# Altium PCB PCB Layers.PcbDoc
Units mm, origin at the board's own origin, x right, y up, seen from the top; angles counter-clockwise.
Board outline 152.4 x 101.6 mm, 4 copper layers (Top Layer, Int1 (GND), Int2 (PWR), Bottom Layer), stack 1.57 mm thick; 31 components, 25 nets, 165 pads, 40 vias.
Unrouted connection lines stored in the file: 16.
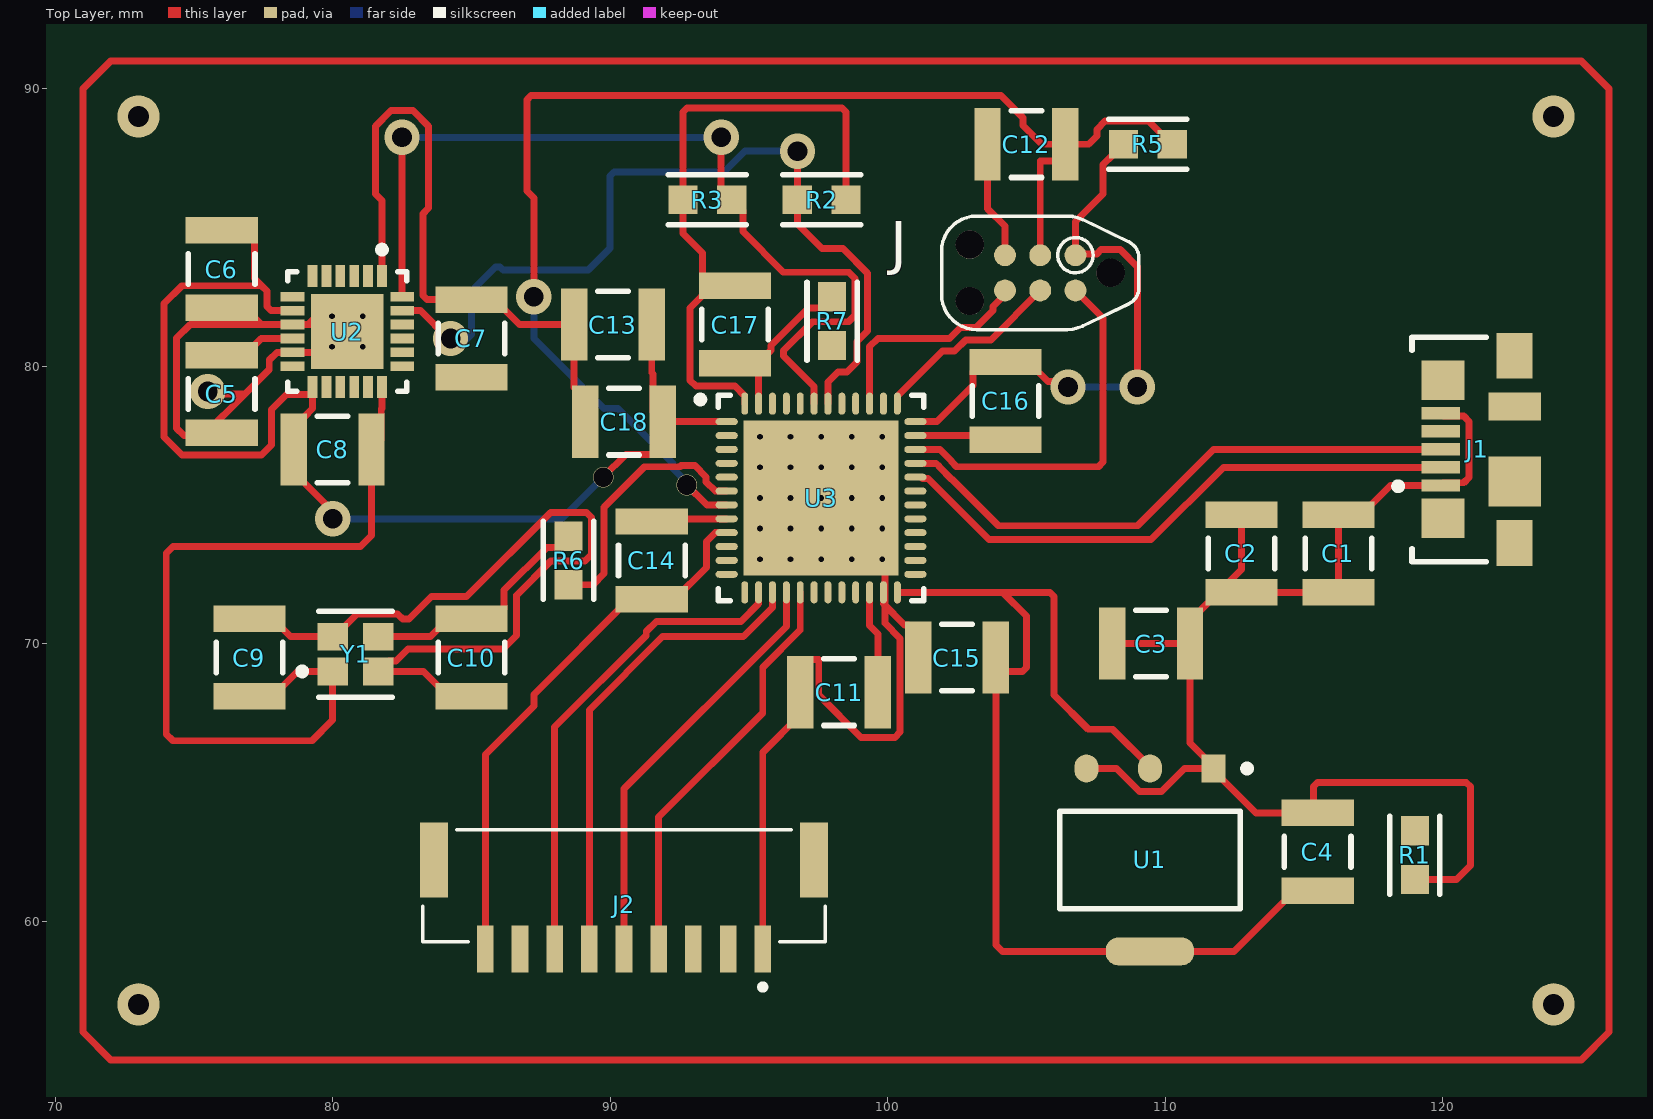
[diagram p0: Top Layer view]
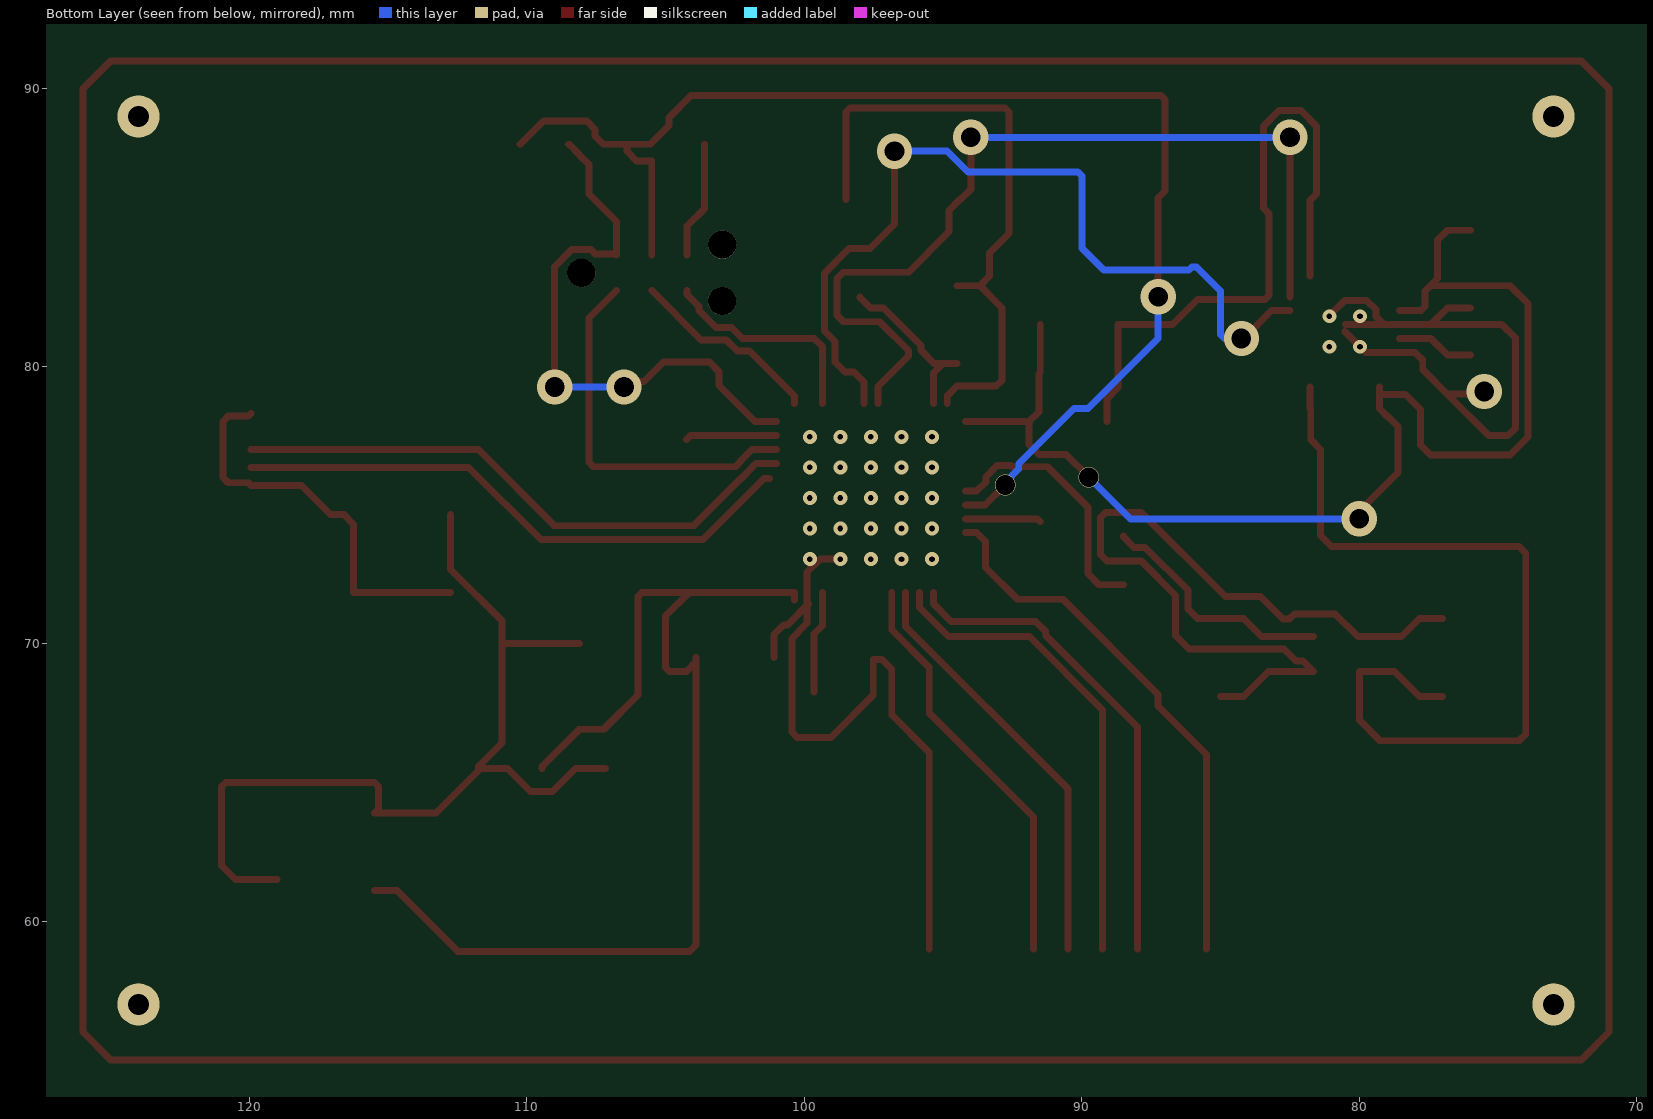
[diagram p1: Bottom Layer view, seen from below]
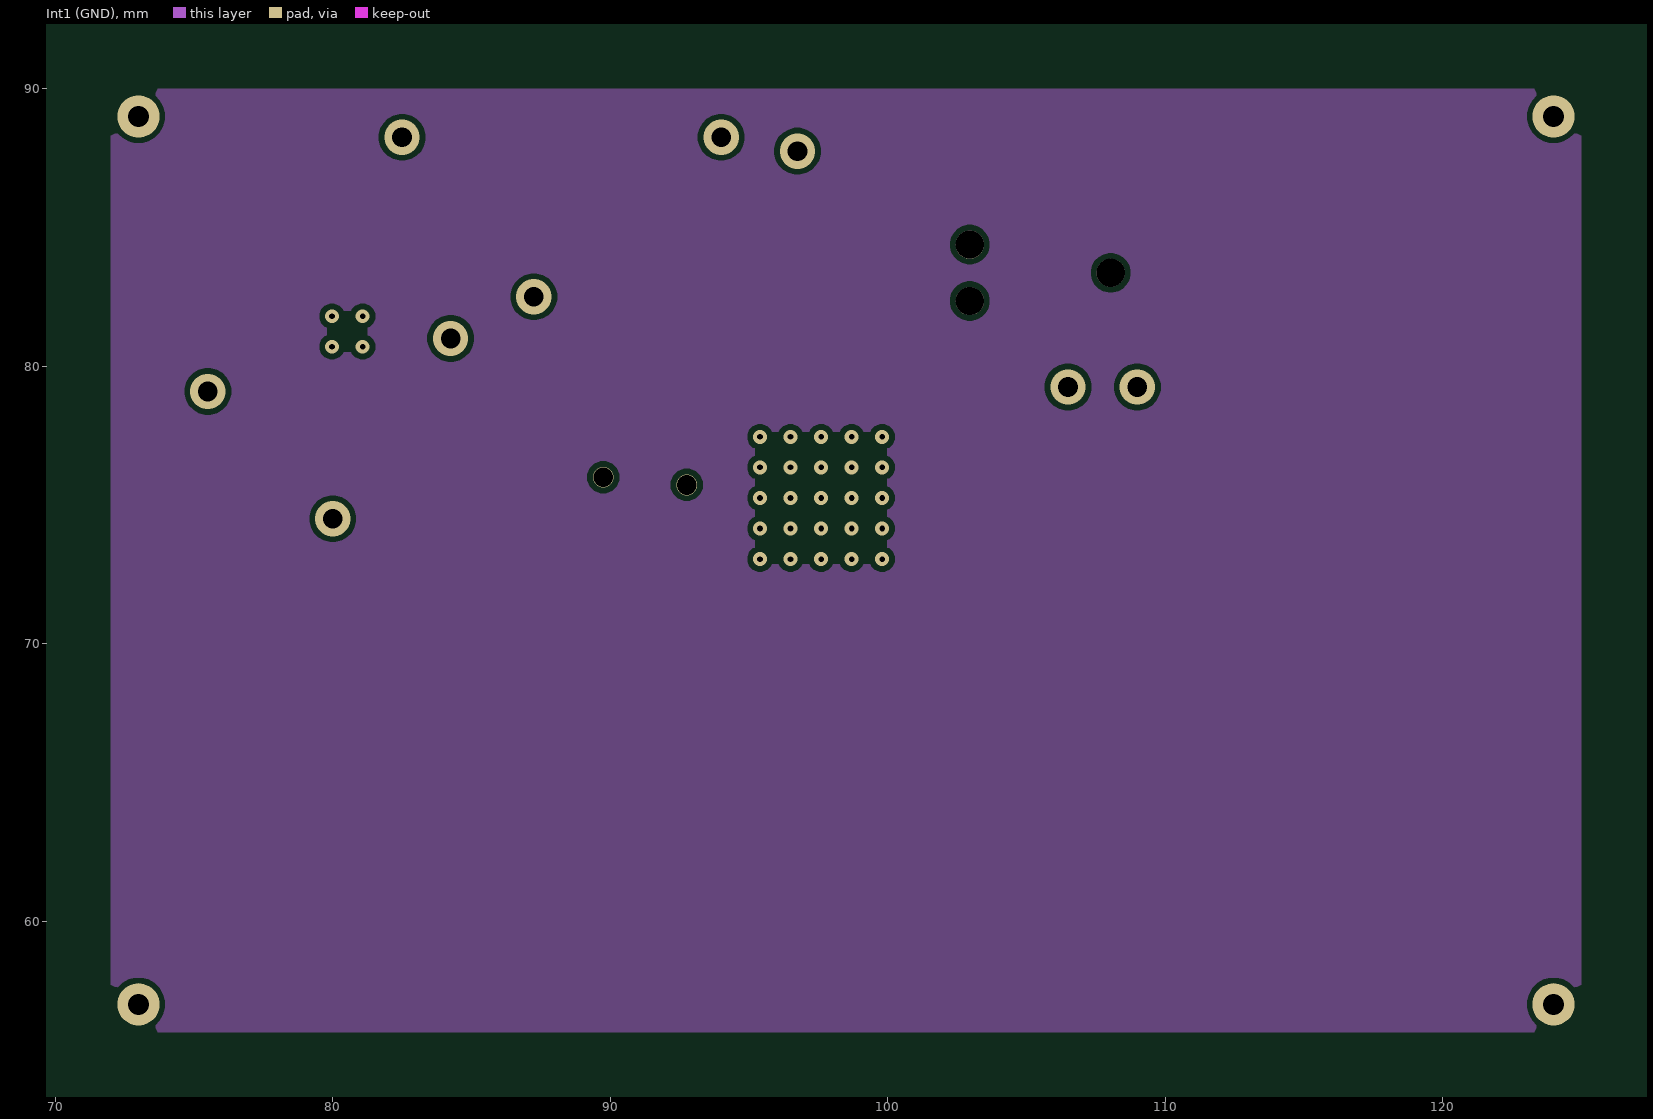
[diagram p2: Int1 (GND)]

## Layer stack, top to bottom
Top Solder: solder mask 0.0254, SM-001, Dk 4
Top Layer: signal copper 0.035
Dielectric 1: prepreg 0.2, PP-017, Dk 4.6
Int1 (GND): signal copper 0.0175
Dielectric 3: core 1.065, Core-039, Dk 4.6
Int2 (PWR): signal copper 0.0175
Dielectric 5: prepreg 0.2, PP-017, Dk 4.6
Bottom Layer: signal copper 0.035
Bottom Solder: solder mask 0.0254, SM-001, Dk 4

## Board outline
25.4,25.4 177.8,25.4 177.8,127 25.4,127

## Design rules (kind name [scope] priority, off if disabled: settings)
Clearance [All] p1: gap=0.2 ignorepadtopadclearanceinfootprint=FALSE
DiffPairsRouting [All] p1: maxlimit=0.254 minlimit=0.203 mostfreqgap=0.254 toplayer_maxgap=0.203 toplayer_prefgap=0.203 toplayer_minwidth=0.26 toplayer_maxwidth=0.26 toplayer_prefwidth=0.26 bottomlayer_maxgap=0.203 bottomlayer_prefgap=0.203 bottomlayer_minwidth=0.26 bottomlayer_maxwidth=0.26 bottomlayer_prefwidth=0.26 impedanceprofiledriven=TRUE impedanceprofileid={CEAF18AB-8639-4A6E-9809-E15BCDD16E7A} impedanceprofilevalue=90.000000 maxuncoupledlength=12.7
PolygonConnect [All] p1: connectstyle=Direct reliefconductorwidth=0.254 reliefentries=4 polygonreliefangle="90 Angle" airgapwidth=0.254
RoutingVias [All] p1: holewidth=0.711 width=1.27 viastyle="Through Hole" minholewidth=0.711 minwidth=1.27 maxholewidth=0.711 maxwidth=1.27
SolderMaskExpansion [All] p1: expansion=0 istentingtop=FALSE
SupplyNets "Schematic Supply Nets_2" [InNet('+5V')] p1: voltage=0.000
SupplyNets "Schematic Supply Nets" [InNet('LED PWR K')] p2: voltage=0.000
UnRoutedNet [All] p1: checkbadconnections=TRUE
Width [All] p1: maxlimit=1 minlimit=0.2 preferedwidth=0.3 midlayer1_minwidth=0.254 midlayer1_maxwidth=0.254 midlayer1_prefwidth=0.254 midlayer2_minwidth=0.254 midlayer2_maxwidth=0.254 midlayer2_prefwidth=0.254 minimp=50.000000 maximp=50.000000 favimp=50.000000
28 further rules are at their usual default settings.

## Components (designator, comment, footprint, x,y, rotation, side; value= is the part's Value field where it differs from the comment)
C1 "2u2" CAPC1210(3225)100_L 116.25,73.25 r270 top value=100nF
C2 "2u2" CAPC1210(3225)100_L 112.75,73.25 r90 top value=100nF
C3 "22u" CAPC1210(3225)100_L 109.5,70 r180 top value=100nF
C4 "22u" CAPC1210(3225)100_L 115.5,62.5 r270 top value=100nF
C5 "100nF" CAPC1210(3225)100_L 76,79 r90 top
C6 "10nF" CAPC1210(3225)100_L 76,83.5 r90 top value=100nF
C7 "2n2" CAPC1210(3225)100_L 85,81 r270 top value=100nF
C8 "100nF" CAPC1210(3225)100_L 80,77 r180 top
C9 "10P" CAPC1210(3225)100_L 77,69.5 r90 top value=100nF
C10 "10P" CAPC1210(3225)100_L 85,69.5 r90 top value=100nF
C11 "2u2" CAPC1210(3225)100_L 98.25,68.25 r0 top value=100nF
C12 "100nF" CAPC1210(3225)100_L 105,88 r0 top
C13 "2.2u" CAPC1210(3225)100_L 90.1,81.5 r0 top value=100nF
C14 "100nF" CAPC1210(3225)100_L 91.5,73 r270 top
C15 "100nF" CAPC1210(3225)100_L 102.5,69.5 r0 top
C16 "100nF" CAPC1210(3225)100_L 104.25,78.75 r90 top
C17 "100nF" CAPC1210(3225)100_L 94.5,81.5 r90 top
C18 "100nF" CAPC1210(3225)100_L 90.5,78 r0 top
J "TC2030-CTX" TC2030-IDC-NL 105.5,83.365 r180 top
J1 "473460001" FP-473460001-MFG 122.25,77 r90 top
J2 "SM09B-GHS-TB(LF)(SN)" JST_SM09B-GHS-TB(LF)(SN) 90.5,60.875 r180 top
R1 "1K" FP-AC0603-IPC_A 119,62.377 r90 top
R2 "2K2" FP-AC0603-IPC_A 97.623,86 r180 top
R3 "2K2" FP-AC0603-IPC_A 93.5,86 r0 top
R5 "10K" FP-AC0603-IPC_A 109.377,88 r0 top
R6 "0R" FP-AC0603-IPC_A 88.5,73 r90 top
R7 "10K" FP-AC0603-IPC_A 98,81.623 r270 top
U1 "ams1117" FP-ams1117-IPC_C 109.456,62.205 r270 top
U2 "MPU-6050" IS-QFN-24_V 80.525,81.25 r270 top
U3 "STM32F411CEU6" STM-UFQFPN48_L 97.6,75.25 r0 top
Y1 "24MHz" FP-ABM10AIG-MFG 80.825,69.625 r0 top

## Footprints (in the part's own frame and the unit in brackets; to place one, negate y for a bottom-side part, rotate by r counter-clockwise, add the part's x,y. Pads: shape width x height; smd on the part's side, far side on the other; paste and mask are expansions set on the pad)
CAPC1210(3225)100_L [mm] "Chip Capacitor, Body 3.2x2.5mm, Height 1mm, IPC High Density"
  rect 0.95x2.6 smd: 1(-1.4,0) 2(1.4,0)
  silkscreen extent -0.55,-1.2 0.55,1.2, body extent -1.7,-1.35 1.7,1.35, height 1
FP-473460001-MFG [mm]
  rect 0.45x1.38 smd paste+0 mask+0: 1(-1.3,2.31) 2(-0.65,2.31) 3(0,2.31) 4(0.65,2.31) 5(1.3,2.31)
  rect 1.425x1.55 smd paste+0 mask+0: 6(-2.488,2.225) 7(2.488,2.225)
  rect 1.65x1.3 smd paste+0 mask+0: 8(-3.375,-0.35) 11(3.375,-0.35)
  rect 1.8x1.9 smd paste+0 mask+0: 9(-1.15,-0.35)
  rect 1x1.9 smd paste+0 mask+0: 10(1.55,-0.35)
  silkscreen extent -4.05,0.67 4.05,3.97, body extent -4.3,-2.48 4.3,3.45, height 0.25
FP-ABM10AIG-MFG [mm]
  rect 1.1x1 smd paste+0 mask+0: 1(-0.825,-0.625) 2(0.825,-0.625) 3(0.825,0.625) 4(-0.825,0.625)
  silkscreen extent -2.05,-1.55 1.33,1.55, body extent -1.48,-1.22 1.48,1.22, height 0.25
FP-AC0603-IPC_A [mm]
  rect 1.059x1.012 smd paste+0 mask+0: 1(-0.877,0) 2(0.877,0)
  silkscreen extent -1.41,-0.91 1.41,0.91, body extent -1.91,-1.01 1.91,1.01, height 0.25
FP-ams1117-IPC_C [mm]
  rect 1.004x0.872 smd paste+0 mask+0: 1(-3.295,2.29)
  rrect100% 1.004x0.872 smd paste+0 mask+0: 2(-3.295,0) 3(-3.295,-2.29)
  rrect87% 1.004x3.182 smd paste+0 mask+0: 4(3.295,0)
  silkscreen extent -3.42,-3.25 1.75,3.63, body extent -3.9,-3.35 3.9,3.35, height 0.25
IS-QFN-24_V [mm] "QFN, 24-Leads, Body 4x4mm, Pitch 0.5mm, Thermal Pad 2.7x2.6mm"
  rect 0.8x0.35 smd: 1(-2,1.25) 2(-2,0.75) 3(-2,0.25) 4(-2,-0.25) 5(-2,-0.75) 6(-2,-1.25) 13(2,-1.25) 14(2,-0.75) 15(2,-0.25) 16(2,0.25) 17(2,0.75) 18(2,1.25)
  rect 0.35x0.85 smd mask+0.102: 7(-1.25,-1.975) 8(-0.75,-1.975) 9(-0.25,-1.975) 10(0.25,-1.975) 11(0.75,-1.975) 12(1.25,-1.975) 19(1.25,1.975) 20(0.75,1.975) 21(0.25,1.975) 22(-0.25,1.975) 23(-0.75,1.975) 24(-1.25,1.975)
  rect 2.7x2.6 smd: 25(0,0)
  silkscreen extent -3.07,-2.15 2.15,2.15, body extent -2,-2 2,2, height 0.95
JST_SM09B-GHS-TB(LF)(SN) [mm]
  rect 0.6x1.7 smd paste+0 mask+0.102: 1(-5,1.875) 2(-3.75,1.875) 3(-2.5,1.875) 4(-1.25,1.875) 5(0,1.875) 6(1.25,1.875) 7(2.5,1.875) 8(3.75,1.875) 9(5,1.875)
  rect 1x2.7 smd paste+0 mask+0.102: MP1(-6.85,-1.325) MP2(6.85,-1.325)
  silkscreen extent -7.25,-2.42 7.25,3.35, body extent -7.25,-2.42 8.23,2.42, height 4.25
STM-UFQFPN48_L [mm] "QFN, 48-Leads, Body 7.1x7.1mm, Pitch 0.5mm, Thermal Pad 5.6x5.6mm, IPC High Density"
  oval 0.8x0.25 smd: 1(-3.4,2.75) 2(-3.4,2.25) 3(-3.4,1.75) 4(-3.4,1.25) 5(-3.4,0.75) 6(-3.4,0.25) 7(-3.4,-0.25) 8(-3.4,-0.75) 9(-3.4,-1.25) 10(-3.4,-1.75) 11(-3.4,-2.25) 12(-3.4,-2.75) 25(3.4,-2.75) 26(3.4,-2.25) 27(3.4,-1.75) 28(3.4,-1.25) 29(3.4,-0.75) 30(3.4,-0.25) 31(3.4,0.25) 32(3.4,0.75) 33(3.4,1.25) 34(3.4,1.75) 35(3.4,2.25) 36(3.4,2.75)
  oval 0.25x0.8 smd: 13(-2.75,-3.4) 14(-2.25,-3.4) 15(-1.75,-3.4) 16(-1.25,-3.4) 17(-0.75,-3.4) 18(-0.25,-3.4) 19(0.25,-3.4) 20(0.75,-3.4) 21(1.25,-3.4) 22(1.75,-3.4) 23(2.25,-3.4) 24(2.75,-3.4) 37(2.75,3.4) 38(2.25,3.4) 39(1.75,3.4) 40(1.25,3.4) 41(0.75,3.4) 42(0.25,3.4) 43(-0.25,3.4) 44(-0.75,3.4) 45(-1.25,3.4) 46(-1.75,3.4) 47(-2.25,3.4) 48(-2.75,3.4)
  rect 5.6x5.6 smd: 49(0,0)
  silkscreen extent -4.47,-3.7 3.7,3.7, body extent -3.55,-3.55 3.55,3.55, height 0.6
TC2030-IDC-NL [mil]
  round 31 smd paste-39.37: 1(-50,-25) 2(-50,25) 3(0,-25) 4(0,25) 5(50,-25) 6(50,25)
  round 40 hole 40 unplated: ""(-100,0) ""(100,-40) ""(100,40)
  silkscreen extent -140,-80 140,81

## Part data
C1 C2 C3 C4 C5 C6 C7 C8 C11 C12 C17: library part CMP-1038-01633-2, "CAP 100nF 16V ±5% 1210 (3225 Metric) Thickness 1mm SMD", Case-EIA=1210, Case-Metric=3225, Rated Voltage="16 V", Tolerance=Â±5%, Max Thickness="1 mm", Technology=SMT
C9 C10: library part CMP-1038-01633-2, "2.2u", Case-EIA=1210, Case-Metric=3225, Rated Voltage="16 V", Tolerance=Â±5%, Max Thickness="1 mm", Technology=SMT
C13 C14 C15 C16 C18: library part CMP-1038-01633-2, Case-EIA=1210, Case-Metric=3225, Rated Voltage="16 V", Tolerance=Â±5%, Max Thickness="1 mm", Technology=SMT
J: "CortexÂ® Plug-Of-Nailsâ„¢ Adapter Cable", Package=None, Availability=Unavailable, MF="Tag-Connect LLC", MP=TC2030-CTX, Price=None, SnapEDA_Link=https://www.snapeda.com/parts/TC2030-CTX/Tag-Connect%20LLC/view-part/225831/?ref=snap
J1: library part CMP-2000-05246-2, "CONN RCPT USB2.0 MICRO B SMD R/A", Current Rating=1.8A, Manufacturer=Molex, Package=0, Temperature="-30°C to +85°C", Temperature Range High=+85°C, Temperature Range Low=-30°C, Voltage Rating=30V, Automotive=No, Category=Conn, ComponentLink2Description=Datasheet, ComponentLink2URL=https://www.molex.com/webdocs/datasheets/pdf/en-us/0473460001_IO_CONNECTORS.pdf, Conn Orientation="Right Angle", Contact Material=Gold,Nickel, Device Class L1=Connectors, Device Class L2="USB Connectors", Device Class L3=unset, Digikey Description="CONN RCPT USB2.0 MICRO B SMD R/A", Footprint Url=https://www.molex.com/pdm_docs/sd/473460001_sd.pdf, Height=2.945mm, Is Female=yes, Lead Free=Yes, Manufacturer Part Number=473460001, Number Of Contacts=5, Octopart=https://octopart.com/47346-0001-molex-7164928, Pitch=0.65mm, RoHS=TRUE, Shielding=true, Usb Standard="USB 2.0"
J2: "PLUS LOURD, 1,25 MM, 9 DIRECTIONS, SMT, 90 DEGRÃ‰S ; Hauteur : 1,25 mm ; Type de connecteur : Fil-Ã -carte ; Note actuelle : 1A ; TempÃ©rature maximale de fonctionnement : 85Â°C ; Taille maximale des fils AWG : 26AWG ; TempÃ©rature minimale de fonctionnem", Package=None, Check_prices=https://www.snapeda.com/parts/SM09B-GHS-TB%20(LF)(SN)/JST/view-part/?ref=eda, MF=JST, MP="SM09B-GHS-TB (LF)(SN)", SnapEDA_Link=https://www.snapeda.com/parts/SM09B-GHS-TB%20(LF)(SN)/JST/view-part/?ref=snap
R1 R2 R3 R5 R6 R7: library part CMP-03412-040683-1, "RES 10kΩ 5.00% 0.2W 0603"
U1: library part CMP-209535-000002-1, "1A LOW DROPOUT VOLTAGE REGULATOR", RoHS Compliant=Yes
U2: library part CMP-1753-00002-2, "3-Axis Gyroscope, Accelerometer and a Digital Motion Processor(TM) (DMP), 2.375 to 3.46 V, -40 to 85 degC, 24-Pin QFN, RoHS, Tape and Reel", Manufacturer=InvenSense, Standard Package=5,000, Category=Sensors,Transducers, Datasheet URL=http://datasheet.octopart.com/MPU-6050-InvenSense-datasheet-14421344.pdf, Datasheet Version="Rev. 3.3, 05/2012", Dynamic Catalog=MPU-6000™Series, Family=Multifunction, Featured Product=MPU-60506-Axis,IntegratedI²CSolution, Manufacturer URL=http://www.invensense.com/, Online Catalog=MPU-6000™Series, Other Names="1428-1007-2 / MPU6050", Output Type=Digital, Sensor Type=MotionTracking, Unit PriceUSD=Digital
U3: library part CMP-0243-00165-1, "ARM Cortex-M4 32-bit MCU+FPU, 512 KB Flash, 128 KB RAM, 36 I/Os, 48-Pin UFQFPN, -40 to 85 degC, Tray", I/Os (High Current)=36, Operating Frequency(F) (Processor speed) (MHz)=100, Package Description=UFQFPN48, Package Reference="48-Pin Ultra Thin Fine Pitch Quad Flat No-Lead, 7 x 7 x 0.6 mm Body, 0.5 mm Pitch, Exposed Pad", Supply Voltage(Vcc) min (V)=1.7, ComponentLink1Description="Manufacturer URL", ComponentLink1URL=http://www.st.com/, ComponentLink2Description=Datasheet, ComponentLink2URL=http://www.st.com/st-web-ui/static/active/en/resource/technical/document/datasheet/DM00115249.pdf, Core="ARM Cortex-M4", DatasheetVersion="Rev. 6", FLASH Size (Prog) (kB)=512, Internal RAM Size (kB)=128, Mounting Technology="Surface Mount", Packing=Tray
Y1: library part CMP-27762-010727-1, "Crystal 24MHz ±30ppm 10pF SMD-4 2.5mm x 2mm Automotive", Case/Package=SMD/SMT, ESR (Equivalent Series Resistance)=60R, Frequency Stability=50ppm, Frequency Tolerance=30ppm, Load Capacitance=10pF, Max Operating Temperature=105°C, Min Operating Temperature=-40°C, Ratings=AEC-Q200, Frequency=24MHz, Height=0.024inch, Length=0.098inch, Mount="Surface Mount", Packaging="Tape and Reel", RoHS Compliant=Yes, Width=0.079inch

## Free pads (board coordinates)
  round 1.524 hole 0.762: 1(73,57) 2(73,89) 3(124,89) 4(124,57)

## Via types
v1: diameter 0.5, hole 0.2, Top Layer to Bottom Layer, 29 vias
v2: diameter 1.27, hole 0.711, Top Layer to Bottom Layer, 9 vias
v3: diameter 0.75, hole 0.711, Top Layer to Bottom Layer, 2 vias

## Nets (pads, with @x,y where several pads share a name; then routed paths per layer and width w, separated by ;. In a path a pad name is that pad's centre, name@x,y a point inside that pad or via, vN(x,y) a via of type N, cw(c..) or ccw(c..) an arc to the next point about the centre after c; other vN are vias at no path point)
+5V: C1.1 C1.2 C2.1 C2.2 C3.1 C3.2 C4.1 C5.1 C6.1 C7.1 C8.1 C9.1 C11.1 C12.1 C13.1 C14.1 C15.1 C16.1 C17.1 C18.1 J1.1 J1.5 J2.1 J.5 R1.1 R7.1 U1.1 U1.3 U2.1 U2.9 U2.11 U2.18 U2.25 U3.5 U3.8 U3.23 U3.35 U3.47 U3.49 Y1.1 | length 170.5
  Top Layer w0.25: v2(75.5,79.09) 75.59,79 76.835,79 ; C6.1 76.825,82.1 77.425,81.5 ; C9.1 77.825,68.1 78.725,69 Y1.1 80,67.25 79.25,66.5 74.25,66.5 74,66.75 74,73.25 74.25,73.5 81,73.5 81.4,73.9 C8.1 81.75,77.35 81.75,78.45 81.775,78.475 U2.18 ; U2.25@80.5,81.5 79.11,81.5 ; U2.25 79.775,80.5 77.99,80.5 77.712,80.222 77.712,79.878 76.835,79 ; U2.25@81.075,81.938 80.962,81.938 80.525,82.375 79.737,82.375 79.4,82.038 79.4,81.79 79.11,81.5 ; U2.1 81.775,85.969 81.54,86.204 81.54,88.648 82.102,89.21 82.898,89.21 83.46,88.648 83.46,85.699 83.255,85.495 83.255,82.546 83.402,82.4 C7.1 85.825,82.4 86.725,81.5 C13.1 88.7,79.225 89.1,78.825 C18.1 ; C14.1 91.6,74.5 U3.8 ; U3.47 95.35,79.75 95,80.1 C17.1 95.325,80.1 95.8,80.575 95.8,80.75 97.146,82.096 97.619,82.096 98,82.477 R7.1 ; J2.1 95.5,66.075 96.85,67.425 C11.1 96.85,69.075 97.2,69.425 97.518,69.425 97.518,68.147 99.04,66.625 100.26,66.625 100.45,66.815 100.45,70.186 99.9,70.736 99.9,72.575 99.425,73.05 v1(98.7,73.05) ; 99.85,71.439 100.614,70.675 100.75,70.675 101.1,70.325 C15.1 ; U3.35 104.1,77.5 C16.1 ; C12.1 103.6,85.675 104.23,85.045 J.5 ; U1.3 108.25,65.5 109.077,64.673 109.874,64.673 110.701,65.5 U1.1 111.746,65.566 110.9,66.412 C3.1 ; C3.2 C3.1 ; U1.1@111.746,65.434 113.28,63.9 C4.1 115.354,64.046 115.354,64.854 115.5,65 120.854,65 121,64.854 121,62 120.5,61.5 R1.1 ; C2.1 C1.2 116.25,74.3 116.6,74.65 117.075,74.65 118.125,75.7 J1.1 120.04,75.8 120.765,75.8 120.955,75.99 120.955,78.01 120.765,78.2 120.04,78.2 J1.5 ; C2.2 112.75,72.675 110.9,70.825 C3.1 ; 76.835,79 75.335,77.5 74.639,77.5 74.375,77.764 74.375,81.01 74.865,81.5 77.425,81.5 ; 77.425,81.5 U2.9 79.11,81.5
  other v1: 95.4,73.05 96.5,73.05 97.6,73.05 99.8,73.05 95.4,74.15 96.5,74.15 97.6,74.15 98.7,74.15 99.8,74.15 95.4,75.25 96.5,75.25 97.6,75.25 98.7,75.25 99.8,75.25 95.4,76.35 96.5,76.35 97.6,76.35 98.7,76.35 99.8,76.35 95.4,77.45 96.5,77.45 97.6,77.45 98.7,77.45 99.8,77.45 79.975,80.7 81.075,80.7 79.975,81.8 81.075,81.8
"IMU CPOUT": C7.2 U2.20
"IMU INT": U2.12 U3.45
"IMU SCL": R2.2 U2.23 U3.42 | length 30.9
  Top Layer w0.25: U2.23 83.165,82 84.165,81 v2(84.25,81) ; v2@96.75,87.5 96.747,87.497 R2.2 96.747,85.119 97.631,84.235 98.397,84.235 99.281,83.35 99.281,81.271 98.9,80.89 98.9,80.152 98.537,79.788 98.213,79.788 97.85,79.425 U3.42
  Bottom Layer w0.25: v2@84.5,81 84.854,81 85,81.146 85,82.705 85.87,83.575 86.032,83.575 86.146,83.46 89.21,83.46 90,84.25 90,86.854 90.146,87 94.108,87 94.858,87.75 v2(96.75,87.75)
"IMU SDA": R3.2 U2.24 U3.43 | length 32.5
  Top Layer w0.25: U2.24 v2(82.5,88.25) ; v2(94,88.25) 94,86.377 R3.2 ; R3.2@94.4,86 94.781,85.619 94.781,84.854 96.25,83.385 98.61,83.385 98.831,83.164 98.831,81.836 98.596,81.601 97.287,81.601 96.254,80.568 96.254,80.361 97.35,79.265 U3.43
  Bottom Layer w0.25: v2(82.5,88.25) v2(94,88.25)
"LED PWR K": C4.2 C6.2 C8.2 C13.2 C14.2 C15.2 C16.2 C17.2 C18.2 J2.9 J.1 R2.1 R3.1 R5.1 U1.2 U1.4 U2.8 U2.13 U3.1 U3.9 U3.24 U3.36 U3.48 | length 151.2
  Top Layer w0.25: C6.2 76.825,84.9 77.175,84.55 77.175,83.16 77.435,82.9 ; U2.8 77.771,82 77.625,82.146 77.625,82.71 77.435,82.9 ; U2.13 U2.13@79.275,79.025 ; v2@80,74.75 80,74.775 78.6,76.175 C8.2 78.6,77.825 78.95,78.175 78.975,78.175 79.275,78.475 U2.13@79.275,79.025 ; J2.9 85.5,66 87.25,67.75 87.25,68.175 90.675,71.6 C14.2 92.325,71.6 93.475,72.75 93.475,73.686 93.789,74 U3.9 ; v3(89.75,76) 90.575,76.825 91.55,76.825 91.9,77.175 C18.2 ; C13.2 91.5,79.775 91.55,79.725 91.55,78.35 C18.2 ; U3.1 C18.2 ; C17.2 C17.2@93.675,82.9 ; U3.48 94.85,78.925 94.496,79.279 93.087,79.279 92.875,79.49 92.875,82.1 C17.2@93.675,82.9 ; R2.1 98.5,89.154 98.354,89.3 92.77,89.3 92.623,89.154 R3.1 92.623,84.785 93.325,84.084 93.325,83.25 C17.2@93.675,82.9 ; U3.24@100.35,71.575 U3.24 104.15,71.85 ; U3.36 101.775,78 103.075,79.3 103.075,79.8 103.425,80.15 C16.2 105.075,80.15 105.78,79.445 106.305,79.445 v2(106.5,79.25) ; C15.2 C15.2@103.9,69.35 ; R5.1 108.477,88 108.096,87.619 108.096,87.596 107.77,87.27 107.77,86.208 106.77,85.208 J.1 106.812,84.042 107.539,84.042 107.695,84.198 108.385,84.198 109,83.583 v2(109,79.25) ; U1.2 109.456,65.566 108.106,66.916 107.231,66.916 106,68.146 106,71.7 105.85,71.85 104.15,71.85 ; C4.2 114.675,61.1 112.485,58.91 U1.4 104.136,58.91 103.9,59.146 C15.2@103.9,69.35 ; 77.435,82.9 74.565,82.9 73.925,82.26 73.925,77.44 74.565,76.8 77.435,76.8 77.8,77.165 77.8,78.435 78.34,78.975 79.225,78.975 U2.13@79.275,79.025 ; C15.2@103.9,69.35 104.25,69 104.854,69 105,69.146 105,71 104.15,71.85
  Bottom Layer w0.25: v2(80,74.5) 88.25,74.5 89.521,75.771 89.521,75.979 v3@89.5,76 ; v2(106.5,79.25) v2(109,79.25)
"MCU NRST": C12.2 J.3 R5.2 U3.7 | length 48
  Top Layer w0.25: v2(87.25,82.5) 87.25,86.065 87,86.315 87,89.604 87.146,89.75 104.085,89.75 104.88,88.955 104.88,88.67 105.55,88 C12.2 ; v3(92.761,75.722) 93.483,75 U3.7 ; J.3 105.5,87.4 106.05,87.4 106.4,87.75 C12.2 ; R5.2 110.23,88 109.399,88.831 107.836,88.831 107.543,88.538 107.543,88.293 107.25,88 C12.2
  Bottom Layer w0.25: v2(87.25,82.5) 87.25,81 89.777,78.473 90.276,78.473 92.275,76.473 92.275,76.296 92.761,75.81 v3(92.761,75.722)
"MCU SWCLK": J.4 U3.37 | length 7
  Top Layer w0.25: U3.37 100.35,78.925 101.975,80.55 102.415,80.55 102.815,80.95 103.72,80.95 J.4
"MCU SWDIO": J.2 U3.34 | length 13.7
  Top Layer w0.25: U3.34 101.886,77 102.3,76.586 102.3,76.565 102.49,76.375 107.604,76.375 107.77,76.541 107.77,81.73 J.2
"MCU SWO": J.6 U3.39 | length 7.9
  Top Layer w0.25: U3.39 99.35,80.704 99.646,81 102.229,81 102.629,81.4 103.189,81.4 103.793,82.004 103.793,82.148 104.23,82.585 J.6
NetC5_2: C5.2 U2.10 | length 2.8
  Top Layer w0.25: C5.2 76.825,80.4 77.425,81 U2.10
NetC9_2: C9.2 C10.1 Y1.2 Y1.4 | length 30
  Top Layer w0.25: C9.2 77.825,70.9 78.475,70.25 Y1.4 80.05,70.25 80.875,71.075 82.335,71.075 82.525,70.885 82.75,70.885 83.565,71.7 84.828,71.7 87.859,74.731 89.141,74.731 89.331,74.541 89.331,73.213 89.096,72.978 87.859,72.978 86.625,71.743 86.625,70.29 86.135,69.8 82.71,69.8 82.285,69.375 82.025,69.375 Y1.2 83.275,69 84.175,68.1 C10.1
NetC10_2: C10.2 R6.2 Y1.3 | length 8.8
  Top Layer w0.25: Y1.3 83.525,70.25 84.175,70.9 C10.2 85.825,70.9 86.175,71.25 86.175,71.93 87.718,73.472 88.119,73.472 88.5,73.853 R6.2
NetC11_2: C11.2 U3.22 | length 3.7
  Top Layer w0.25: U3.22 99.35,70.65 99.65,70.35 C11.2
NetD1_2: R1.2
NetD2_1: U3.26
NetD2_2: 
NetJ2_4: J2.4 U3.17 | length 15
  Top Layer w0.25: J2.4 91.75,63.75 95.5,67.5 95.5,69.135 96.85,70.485 U3.17
NetJ2_5: J2.5 U3.16 | length 15.3
  Top Layer w0.25: J2.5 90.5,64.771 96.35,70.621 U3.16
NetJ2_6: J2.6 U3.15 | length 17.3
  Top Layer w0.25: J2.6 89.25,67.614 91.886,70.25 94.798,70.25 95.85,71.302 U3.15
NetJ2_7: J2.7 U3.14 | length 17.7
  Top Layer w0.25: J2.7 88,67 91.3,70.3 91.3,70.436 91.664,70.8 94.711,70.8 95.35,71.439 U3.14
NetR6_1: R6.1 U3.6 | length 9.4
  Top Layer w0.25: R6.1 89.381,72.123 89.781,72.523 89.781,74.916 91.24,76.375 92.51,76.375 92.556,76.422 93.051,76.422 93.461,76.012 93.461,75.828 93.789,75.5 U3.6
NetR7_2: R7.2 U3.44
"USB D N": J1.2 U3.32 | length 20.7
  Top Layer w0.25: U3.32@101.25,75.95 101.461,75.95 103.661,73.75 109.5,73.75 112.1,76.35 J1.2
"USB D P": J1.3 U3.33 | length 21
  Top Layer w0.25: U3.33 101.75,76.5 101.85,76.4 101.85,76.379 102.304,75.925 102.325,75.925 104,74.25 109,74.25 111.75,77 J1.3
pads on no net: J1.4 J1.6 J1.7 J1.8 J1.9 J1.10 J1.11 J2.2 J2.3 J2.8 J2.MP1 J2.MP2 J. U2.2 U2.3 U2.4 U2.5 U2.6 U2.7 U2.14 U2.15 U2.16 U2.17 U2.19 U2.21 U2.22 U3.2 U3.3 U3.4 U3.10 U3.11 U3.12 U3.13 U3.18 U3.19 U3.20 U3.21 U3.25 U3.27 U3.28 U3.29 U3.30 U3.31 U3.38 U3.40 U3.41 U3.46
copper on no net: | length 179.7
  Top Layer w0.254: 71,56 71,90 72,91 73,91 125,91 126,90 126,56 125,55 73,55 72,55 71,56

## Polygon pours and split planes (outlines as drawn)
no net on Int1 (GND) "NONET_L02_P000" (solid, pour order 0): 72,90 72,56 125,56 125,90 124,90